# Altium PCB LM358project.PcbDoc
Units mm, origin at the board's own origin, x right, y up, seen from the top; angles counter-clockwise.
Board outline 32.26 x 27.81 mm, 2 copper layers (Top Layer, Bottom Layer); 9 components, 7 nets, 24 pads, 0 vias.
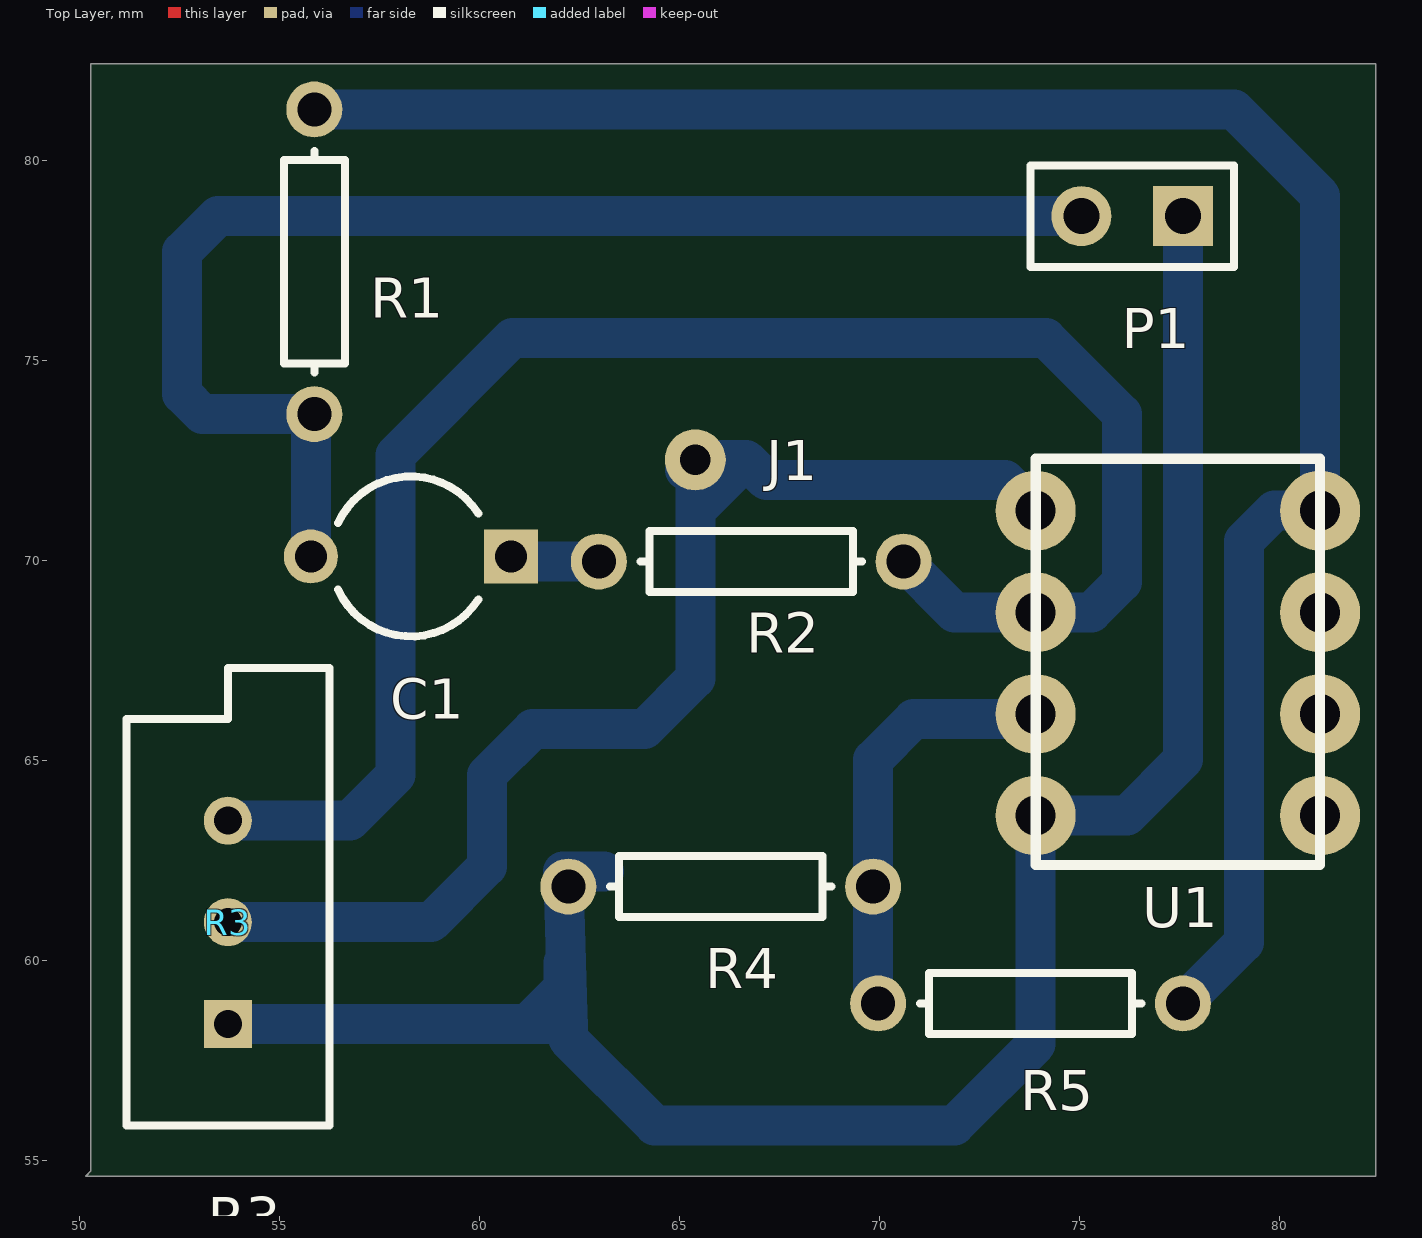
[diagram p0: Top Layer view]
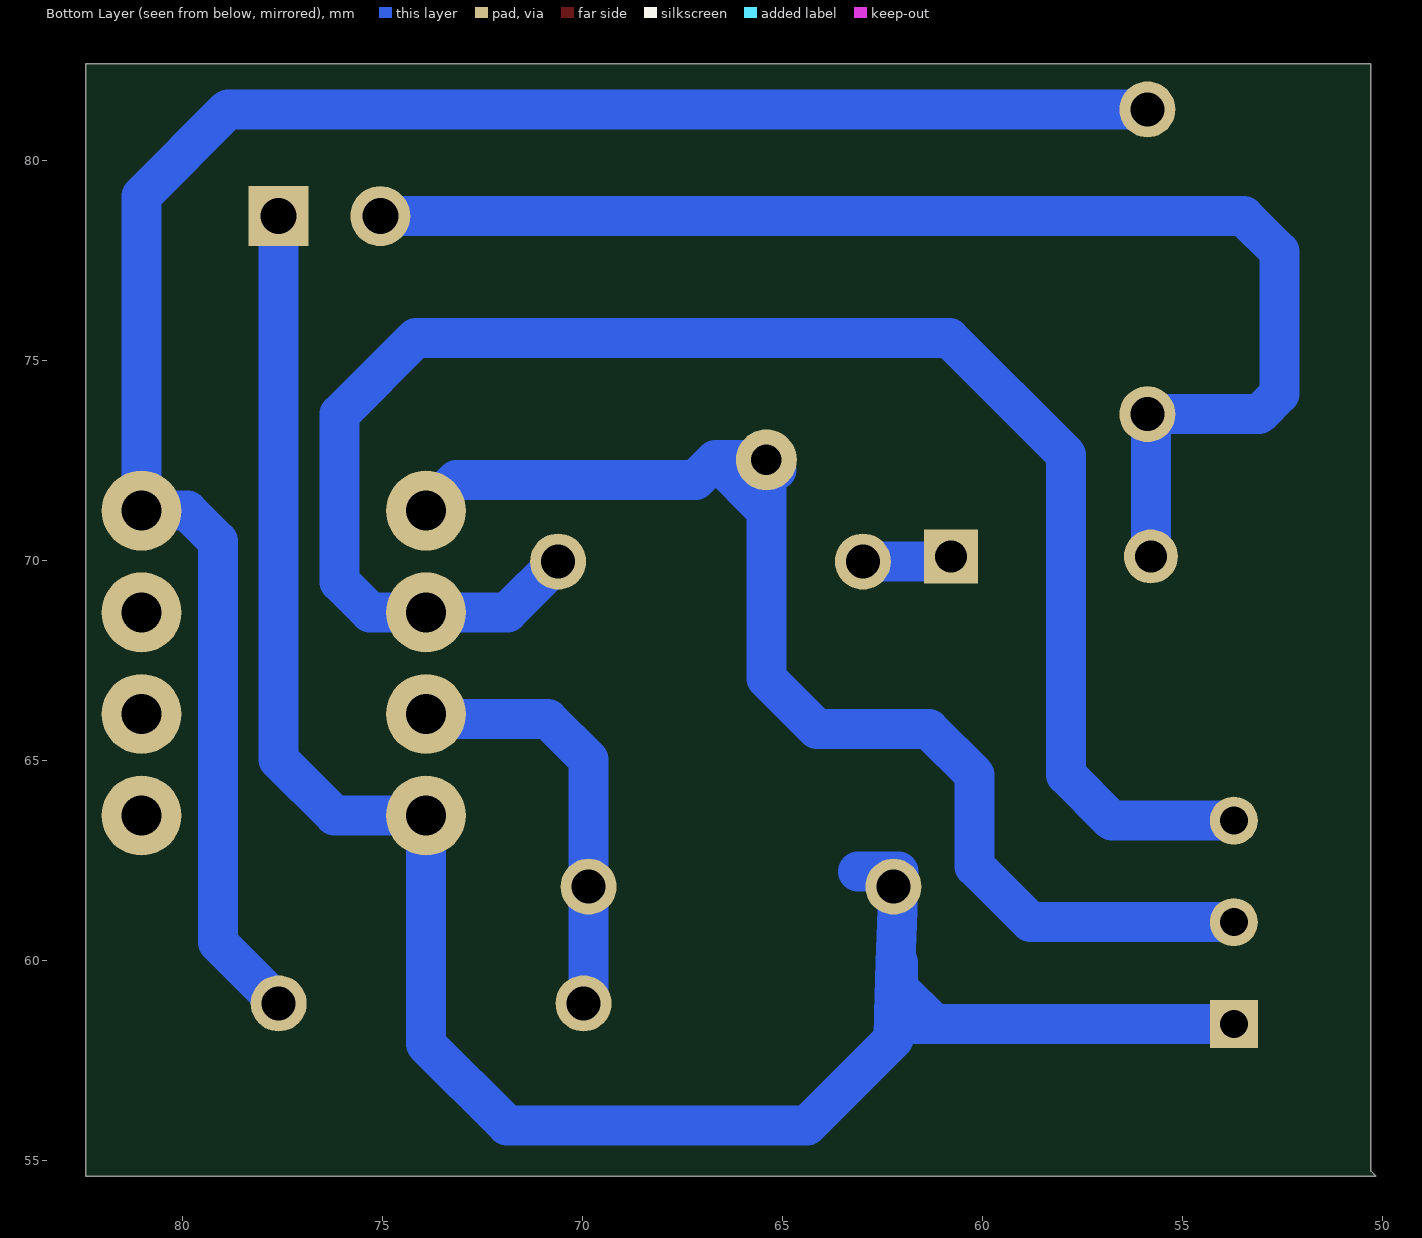
[diagram p1: Bottom Layer view, seen from below]

## Layer stack, top to bottom
Top Solder: solder mask 0.0102, Solder Resist, Dk 3.5
Top Layer: signal copper 0.0356
Dielectric 1: dielectric 0.32, FR-4, Dk 4.8
Bottom Layer: signal copper 0.0356
Bottom Solder: solder mask 0.0102, Solder Resist, Dk 3.5

## Board outline
50.165,54.61 50.292,54.737 50.292,82.423 82.423,82.423 82.423,54.61

## Design rules (kind name [scope] priority, off if disabled: settings)
Clearance [All] p1: gap=0.254 ignorepadtopadclearanceinfootprint=FALSE except(0: Arc-Hole Track-Hole SMDPad-Hole THPad-Hole Via-Hole Fill-Hole Poly-Hole Region-Hole Text-Hole)
PolygonConnect [All] p1: connectstyle=Relief reliefconductorwidth=0.254 reliefentries=4 polygonreliefangle="90 Angle" airgapwidth=0.254
RoutingVias [All] p1: holewidth=0.711 width=1.27 viastyle="Through Hole" minholewidth=0.711 minwidth=1.27 maxholewidth=0.711 maxwidth=1.27
SolderMaskExpansion [All] p1: expansion=0.102
Width [All] p1: maxlimit=2 minlimit=0.5 preferedwidth=1
30 further rules are at their usual default settings.

## Classes and differential pairs
component class Sheet1: J1 P1 R1 R2 R3 R4 R5 U1

## Components (designator, comment, footprint, x,y, rotation, side; value= is the part's Value field where it differs from the comment)
C1 "Cap2" CAPR5-4X5 58.293,70.104 r180 top value=100pF
J1 "Connector" connector 65.405,72.517 r0 top
P1 "Header 2" HDR1X2 77.597,78.613 r180 top
R1 "Res1" AXIAL-0.3 55.88,77.47 r270 top value=10K
R2 "Res1" AXIAL-0.3 66.802,69.977 r180 top value=1K
R3 "RPot" VR5 53.721,60.96 r90 top value=1K
R4 "Res1" AXIAL-0.3 66.04,61.849 r0 top value=10K
R5 "Res1" AXIAL-0.3 73.787,58.928 r180 top value=10K
U1 "LM358" LM358 81.026,72.547 r270 top

## Footprints (in the part's own frame and the unit in brackets; to place one, negate y for a bottom-side part, rotate by r counter-clockwise, add the part's x,y. Pads: shape width x height; smd on the part's side, far side on the other; paste and mask are expansions set on the pad)
AXIAL-0.3 [mm] "Axial Device, Thru-Hole; 2 Leads; 0.3 in Pin Spacing"
  round 1.4 hole 0.85: 1(-3.81,0) 2(3.81,0)
  silkscreen extent -2.77,-0.76 2.77,0.76
CAPR5-4X5 [mm] "Capacitor; 2 Leads"
  rect 1.35x1.35 hole 0.8: 1(-2.5,0)
  round 1.35 hole 0.8: 2(2.5,0)
  silkscreen extent -1.69,-2 1.82,2
connector [mil] "connector"
  round 60 hole 30: 1(0,0)
HDR1X2 [mm] "Connector; Header; 2 Position"
  rect 1.5x1.5 hole 0.9: 1(0,0)
  round 1.5 hole 0.9: 2(2.54,0)
  silkscreen extent -1.27,-1.27 3.81,1.27
LM358 [mm] "LM358"
  round 2 hole 1: 1(1.3,-7.11) 2(3.84,-7.11) 3(6.38,-7.11) 4(8.92,-7.11) 5(8.92,0) 6(6.38,0) 7(3.84,0) 8(1.3,0)
  silkscreen extent 0,-7.11 10.16,0
VR5 [mm] "Thru-Hole; 3 Leads"
  rect 1.2x1.2 hole 0.7: 1(-2.54,0)
  round 1.2 hole 0.7: 2(0,0) 3(2.54,0)
  silkscreen extent -5.08,-2.54 6.35,2.54

## Part data
C1: "Capacitor", PackageDescription="Capacitor; 2 Leads", PackageReference=CAPR5-4X5, Published=23-Sep-2002, Publisher="Altium Limited"
P1: "Header, 2-Pin", LatestRevisionDate=17-Jul-2002, LatestRevisionNote="Re-released for DXP Platform.", Publisher="Altium Limited"
R1 R2 R4 R5: "Resistor", LatestRevisionDate=17-Jul-2002, LatestRevisionNote="Re-released for DXP Platform.", PackageDescription="Axial Device, Thru-Hole; 2 Leads; 0.3 in Pin Spacing", PackageReference=AXIAL-0.3, Published=8-Jun-2000, Publisher="Altium Limited"
R3: "Potentiometer", LatestRevisionDate=17-Jul-2002, LatestRevisionNote="Re-released for DXP Platform.", PackageDescription="Variable Resistor, Thru-Hole; 3 Leads", PackageReference=VR5, Published=8-Jun-2000, Publisher="Altium Limited", Set Position=0.5, Sim Note="Enter the Resistance value and the set point into parameter fields."

## Nets (pads, with @x,y where several pads share a name; then routed paths per layer and width w, separated by ;. In a path a pad name is that pad's centre, name@x,y a point inside that pad or via, vN(x,y) a via of type N, cw(c..) or ccw(c..) an arc to the next point about the centre after c; other vN are vias at no path point)
GND: P1.1 R3.1 R4.1 U1.4 | length 52.6
  Bottom Layer w1: R3.1 61.214,58.42 ; 63.119,62.23 62.103,62.23 62.115,61.846 62.133,61.244 62.172,59.958 ; P1.1@77.597,78.486 77.597,65.024 76.2,63.627 U1.4 73.916,57.91 71.886,55.88 64.389,55.88 62.23,58.039 62.211,58.681 ; 61.214,58.42 61.949,58.42 62.211,58.681 ; 61.214,58.42 62.117,59.323 62.117,59.958 62.172,59.958 ; 62.172,59.958 62.211,58.681
mic: C1.2 P1.2 R1.2 | length 33.6
  Bottom Layer w1: C1.2@55.793,69.977 C1.2 55.793,73.573 R1.2 53.086,73.66 52.578,74.168 52.578,77.724 53.467,78.613 P1.2
NetC1_1: C1.1 R2.2 | length 2.2
  Bottom Layer w1: C1.1@60.793,69.977 R2.2
NetR2_1: R2.1 R3.3 U1.2 | length 43.3
  Bottom Layer w1: R3.3 56.769,63.5 57.912,64.643 57.912,72.644 60.833,75.565 74.168,75.565 76.073,73.66 76.073,69.469 75.311,68.707 U1.2 71.882,68.707 R2.1
NetR4_2: R4.2 R5.2 U1.3 | length 10.8
  Bottom Layer w1: R5.2 69.85,59.055 R4.2 69.85,65.024 70.866,66.04 73.916,66.04 U1.3@74.043,66.167
o/p: J1.1 R3.2 U1.1 | length 32.2
  Bottom Layer w1: R3.2 58.801,60.96 60.198,62.357 60.198,64.643 61.341,65.786 64.135,65.786 65.405,67.056 65.405,71.247 ; J1.1@65.151,72.263 J1.1@65.405,72.263 ; J1.1 J1.1@65.405,72.263 ; U1.1 73.154,72.009 67.183,72.009 66.675,72.517 ; 65.405,71.247 66.675,72.517 ; 65.405,71.247 J1.1@65.405,72.263 ; J1.1@65.405,72.263 65.659,72.263 65.913,72.517 66.675,72.517
VCC: R1.1 R5.1 U1.8 | length 48.3
  Bottom Layer w1: R1.1 78.867,81.28 81.026,79.121 U1.8 79.883,71.247 79.121,70.485 79.121,60.452 R5.1
pads on no net: U1.5 U1.6 U1.7